# EAGLE board OpenHealth_rj45 (EAGLE 7.2.0)
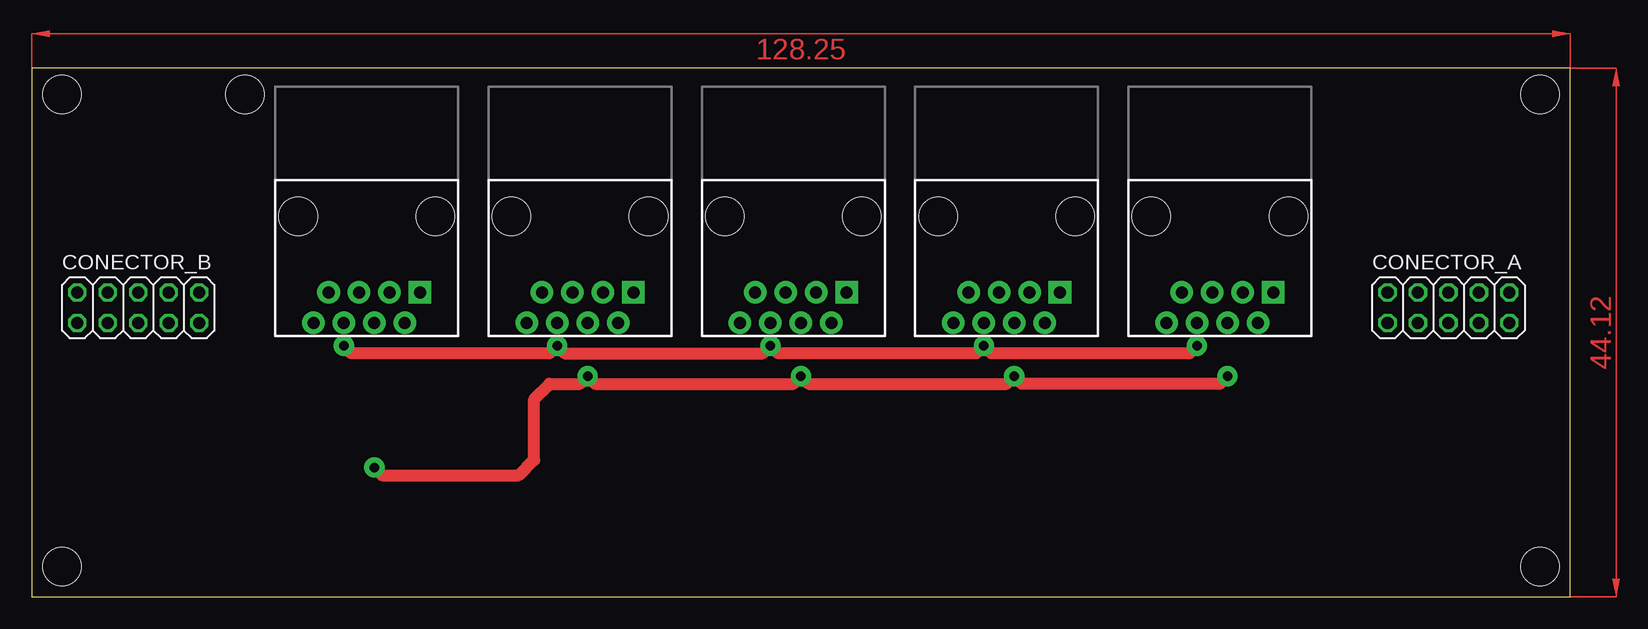
[diagram p0: board, top side]
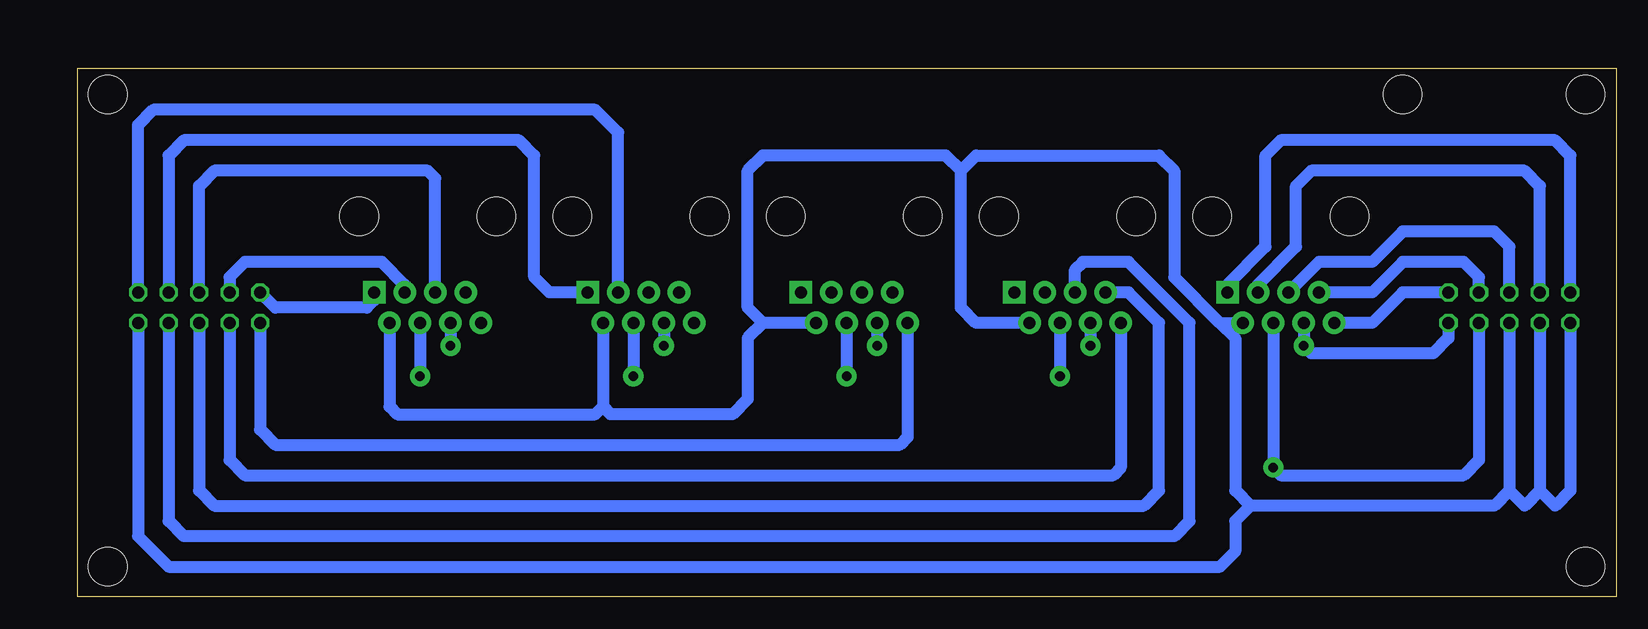
[diagram p1: board, bottom side, seen from below]

Size 128.25 x 44.12 mm. Coordinates in mm from the lower left corner, seen from the top.
Outline: 0,0 128.25,0 128.25,44.12 0,44.12 0,0
Copper layers (1*16): Top 0.035mm / dielectric 1.5mm / Bottom 0.035mm
Design rules "default": minimum track width 10mil, minimum drill 24mil, track to track 8mil, track to pad 8mil, pad to pad 8mil, via to via 8mil, smd to smd 8mil, copper to edge 40mil, drill to drill 8mil, minimum pad ring 10mil, minimum via ring 8mil, stop-mask expansion 4mil, vias tented up to drill 0mil, thermal gap 10mil
Holes 3.2 mm at 2.54,41.91 2.54,2.54 125.73,41.91 125.73,2.54 17.78,41.91

## Footprints (pad centres in the part's own frame; a part is rotated, then mirrored left to right if it is on the bottom)
RJ45-8 = drill 1 pad 1.88 square: 1 -4.445,6.35 | drill 1 pad 1.88: 2 -3.175,8.89; 3 -1.905,6.35; 4 -0.635,8.89; 5 0.635,6.35; 6 1.905,8.89; 7 3.175,6.35; 8 4.445,8.89 | hole 3.2: -5.715,0; 5.715,0
2X05 = drill 1.016 octagon: 1 -5.08,-1.27; 2 -5.08,1.27; 3 -2.54,-1.27; 4 -2.54,1.27; 5 0,-1.27; 6 0,1.27; 7 2.54,-1.27; 8 2.54,1.27; 9 5.08,-1.27; 10 5.08,1.27

## Placement (x,y rotation side)
ALTURA  RJ45  [RJ45-8]  81.28,31.75 180 top
CONECTOR_A  [2X05]  118.11,24.13 0 top
CONECTOR_B  [2X05]  8.89,24.13 0 top
ELECTROCARDIOGRAMA  RJ45  [RJ45-8]  99.06,31.75 180 top
PESO  RJ45  [RJ45-8]  27.94,31.75 180 top
PRESION_SANGUINEA  RJ45  [RJ45-8]  45.72,31.75 180 top
TEMPERATURA  RJ45  [RJ45-8]  63.5,31.75 180 top

## Library data of the parts
ALTURA ELECTROCARDIOGRAMA PESO PRESION_SANGUINEA TEMPERATURA = SparkFun-Connectors; PROD_ID: CONN-08506
CONECTOR_A CONECTOR_B = pinhead

## Nets
3.3V: ALTURA.4 CONECTOR_B.7 ELECTROCARDIOGRAMA.4 PESO.4 PRESION_SANGUINEA.4 TEMPERATURA.4
A0: CONECTOR_A.1 TEMPERATURA.8
BPM_RX: CONECTOR_A.7 PRESION_SANGUINEA.5
BPM_TX: CONECTOR_A.5 PRESION_SANGUINEA.7
D11: ALTURA.1 CONECTOR_A.8
D12: ALTURA.3 CONECTOR_A.10
GND: ALTURA.2 CONECTOR_A.9 CONECTOR_B.1 CONECTOR_B.3 CONECTOR_B.5 ELECTROCARDIOGRAMA.2 PESO.2 PRESION_SANGUINEA.2 TEMPERATURA.2
LA: CONECTOR_A.4 ELECTROCARDIOGRAMA.3
LCA_BLK: CONECTOR_B.8 PESO.7
LCA_GRN: CONECTOR_B.4 PESO.3
LCA_RED: CONECTOR_B.10 PESO.8
LCA_WHT: CONECTOR_B.6 PESO.5
LCA_YLW: CONECTOR_B.2 PESO.1
RA: CONECTOR_A.6 ELECTROCARDIOGRAMA.5
RL: CONECTOR_A.2 ELECTROCARDIOGRAMA.1
SALIDA_D6: CONECTOR_A.3 PRESION_SANGUINEA.8
VIN: ALTURA.6 CONECTOR_B.9 ELECTROCARDIOGRAMA.6 PESO.6 PRESION_SANGUINEA.6 TEMPERATURA.6

## Tracks (layer width: path | path; a pad name or v marks a point on that pad's centre or on a via)
3.3V  (via drill 0.8 pad 1.68)
  Top 1.016: v99.69,18.41 99.06,17.78 82.55,17.78 v81.91,18.41 81.28,17.78 64.77,17.78 v64.13,18.41 63.5,17.78 46.99,17.78 v46.35,18.41 45.72,17.78 43.18,17.78 41.91,16.51 41.91,11.43 40.64,10.16 29.21,10.16 v28.57,10.79
  Bottom 1.016: CONECTOR_B.7 11.43,11.43 12.7,10.16 27.94,10.16 v28.57,10.79 PESO.4 | PRESION_SANGUINEA.4 v46.35,18.41 | TEMPERATURA.4 v64.13,18.41 | ALTURA.4 v81.91,18.41 | ELECTROCARDIOGRAMA.4 v99.69,18.41
A0
  Bottom 1.016: CONECTOR_A.1 113.03,13.97 111.76,12.7 59.69,12.7 59.05,13.34 TEMPERATURA.8
BPM_RX
  Bottom 1.016: CONECTOR_A.7 120.65,6.35 119.38,5.08 36.83,5.08 35.56,6.35 35.56,22.86 40.64,27.94 44.45,27.94 45.09,27.3 PRESION_SANGUINEA.5
BPM_TX
  Bottom 1.016: CONECTOR_A.5 118.11,8.89 116.84,7.62 39.37,7.62 38.1,8.89 38.1,22.86 40.64,25.4 PRESION_SANGUINEA.7
D11
  Bottom 1.016: CONECTOR_A.8 120.65,36.83 119.38,38.1 91.44,38.1 90.17,36.83 90.17,26.67 88.9,25.4 ALTURA.1
D12
  Bottom 1.016: CONECTOR_A.10 123.19,39.37 121.92,40.64 85.09,40.64 83.19,38.73 ALTURA.3
GND
  Bottom 1.016: CONECTOR_B.5 8.89,8.89 | 8.89,8.89 10.16,7.62 30.48,7.62 | CONECTOR_B.3 6.35,8.89 | 6.35,8.89 7.62,7.62 8.89,8.89 | CONECTOR_B.1 3.81,8.89 5.08,7.62 6.35,8.89 | CONECTOR_A.9 123.19,5.08 120.65,2.54 33.02,2.54 31.75,3.81 31.75,6.35 30.48,7.62 | TEMPERATURA.2 71.12,22.86 | 54.61,35.56 55.88,36.83 71.12,36.83 72.39,35.56 72.39,24.13 71.12,22.86 | PRESION_SANGUINEA.2 53.34,22.86 54.61,24.13 54.61,35.56 | 54.61,35.56 53.34,36.83 38.1,36.83 36.83,35.56 36.83,26.67 33.02,22.86 | 33.02,22.86 PESO.2 | 30.48,7.62 31.75,8.89 31.75,21.59 33.02,22.86 | ALTURA.2 84.45,15.87 | 84.45,15.87 83.82,15.24 73.66,15.24 72.39,16.51 72.39,21.59 71.12,22.86 | ELECTROCARDIOGRAMA.2 102.23,15.87 101.6,15.24 85.09,15.24 84.45,15.87
LA
  Bottom 1.016: ELECTROCARDIOGRAMA.3 100.97,26.04 102.87,27.94 114.3,27.94 115.57,26.67 CONECTOR_A.4
LCA_BLK
  Bottom 1.016: CONECTOR_B.8 11.43,26.67 12.7,27.94 17.78,27.94 20.32,25.4 PESO.7
LCA_GRN
  Bottom 1.016: CONECTOR_B.4 6.35,34.29 7.62,35.56 25.4,35.56 26.67,34.29 26.67,29.21 29.85,26.04 PESO.3
LCA_RED
  Bottom 1.016: CONECTOR_B.10 17.78,25.4 20.32,22.86 PESO.8
LCA_WHT
  Bottom 1.016: CONECTOR_B.6 8.89,29.21 10.16,30.48 17.78,30.48 20.32,27.94 24.77,27.94 PESO.5
LCA_YLW
  Bottom 1.016: CONECTOR_B.2 3.81,36.83 5.08,38.1 27.94,38.1 29.21,36.83 29.21,29.21 32.38,26.04 PESO.1
RA
  Bottom 1.016: CONECTOR_A.6 118.11,34.29 116.84,35.56 99.06,35.56 98.42,34.93 ELECTROCARDIOGRAMA.5
RL
  Bottom 1.016: ELECTROCARDIOGRAMA.1 103.5,24.76 104.14,24.13 111.76,24.13 CONECTOR_A.2
SALIDA_D6
  Bottom 1.016: CONECTOR_A.3 115.57,11.43 114.3,10.16 41.91,10.16 41.27,10.79 PRESION_SANGUINEA.8
VIN  (via drill 0.8 pad 1.68)
  Top 1.016: v97.16,20.95 96.52,20.32 80.01,20.32 v79.38,20.95 78.74,20.32 62.23,20.32 v61.59,20.95 60.96,20.32 44.45,20.32 v43.81,20.95 43.18,20.32 26.67,20.32 v26.04,20.95
  Bottom 1.016: CONECTOR_B.9 13.97,21.59 15.24,20.32 25.4,20.32 v26.04,20.95 PESO.6 | ALTURA.6 v79.38,20.95 | ELECTROCARDIOGRAMA.6 v97.16,20.95 | PRESION_SANGUINEA.6 v43.81,20.95 | TEMPERATURA.6 v61.59,20.95
(copper drawn outside any net)
  shapes: Top area x2